# Altium PCB PCB_3U_ADC.PCBDOC (part 1 of 2)
Units mil, origin at the board's own origin, x right, y up, seen from the top; angles counter-clockwise.
Board outline 2496.06 x 3937 mil, 4 copper layers (TopLayer, Internal Plane 2, Internal Plane 1, BottomLayer), stack 35.634 mil thick; 110 components, 84 nets, 514 pads, 355 vias.
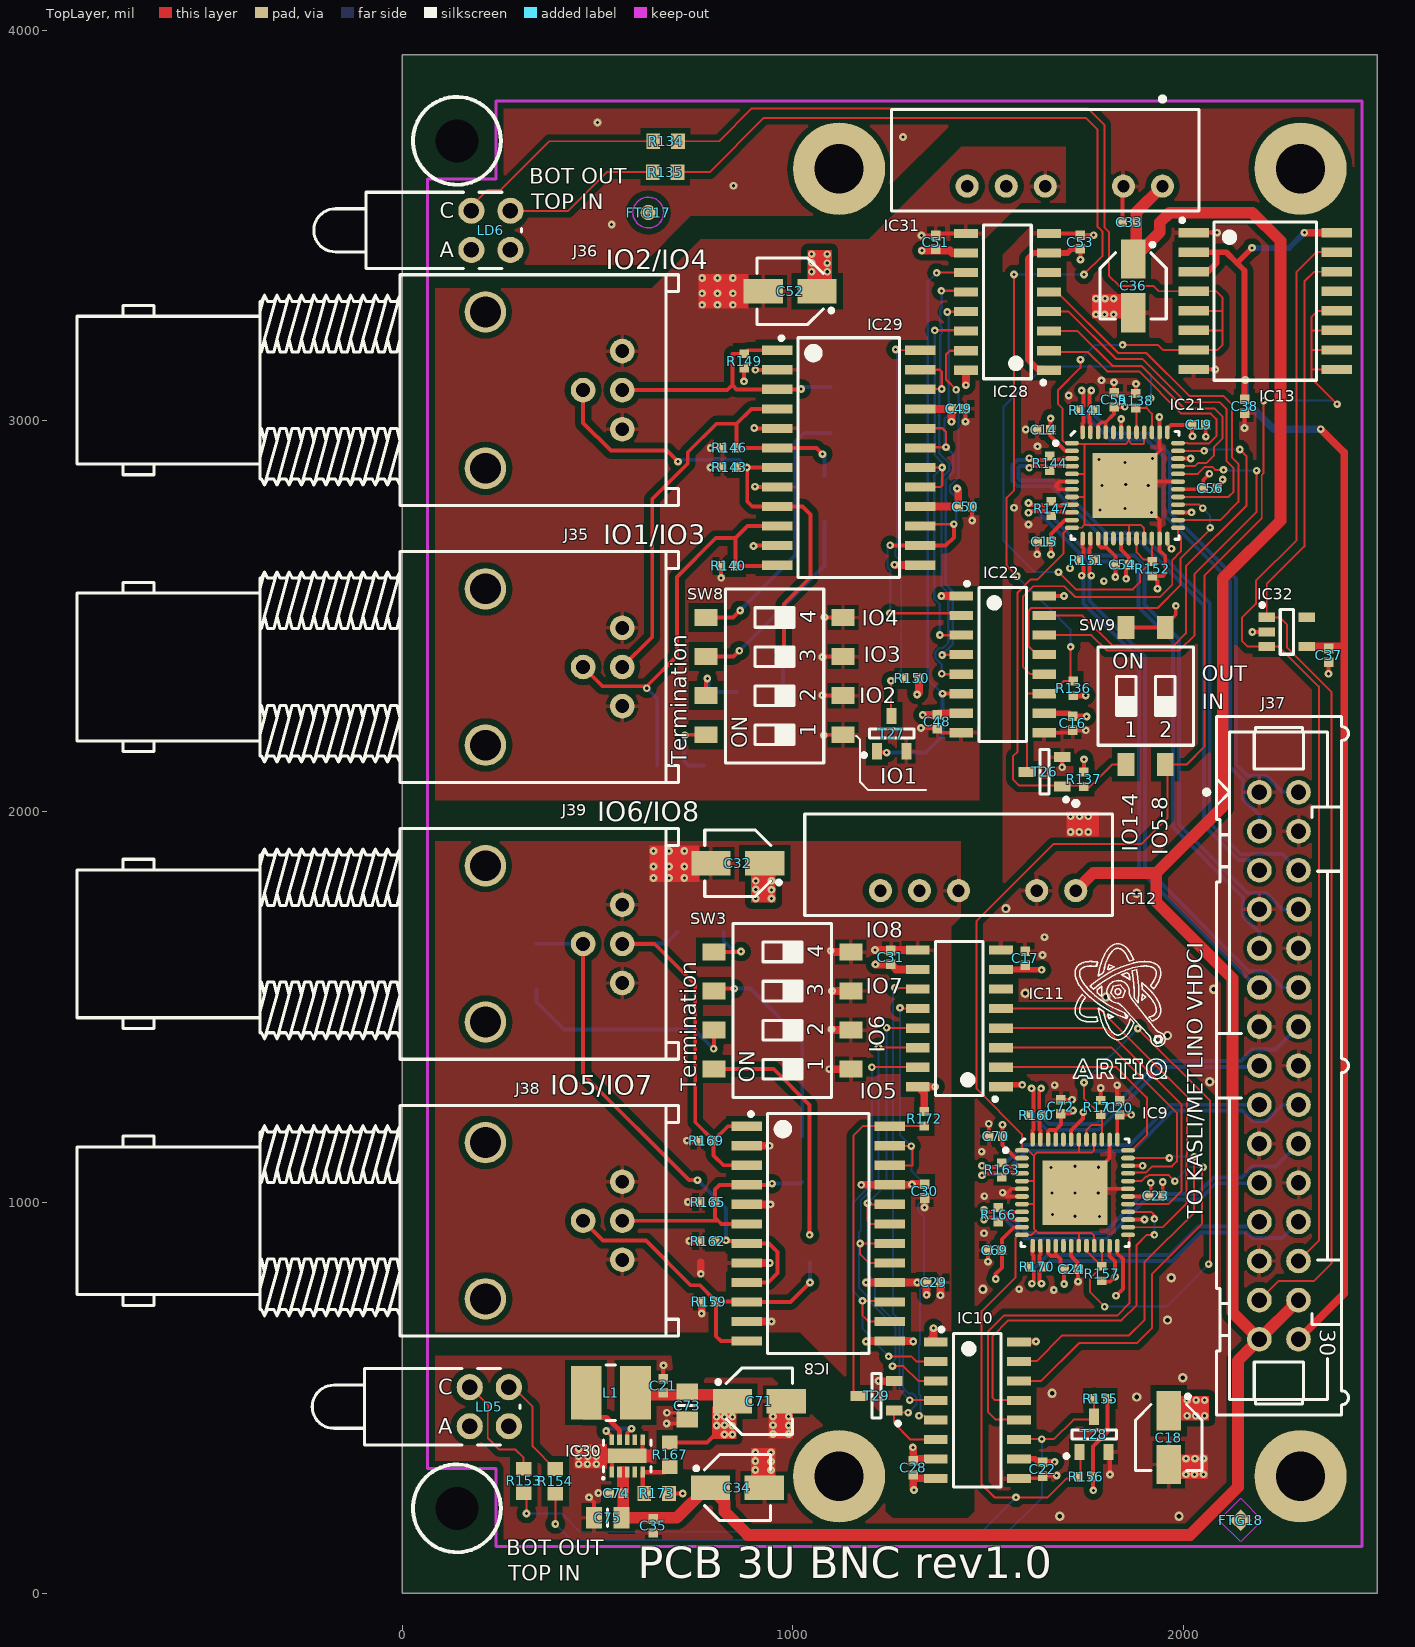
[diagram p0: TopLayer view]
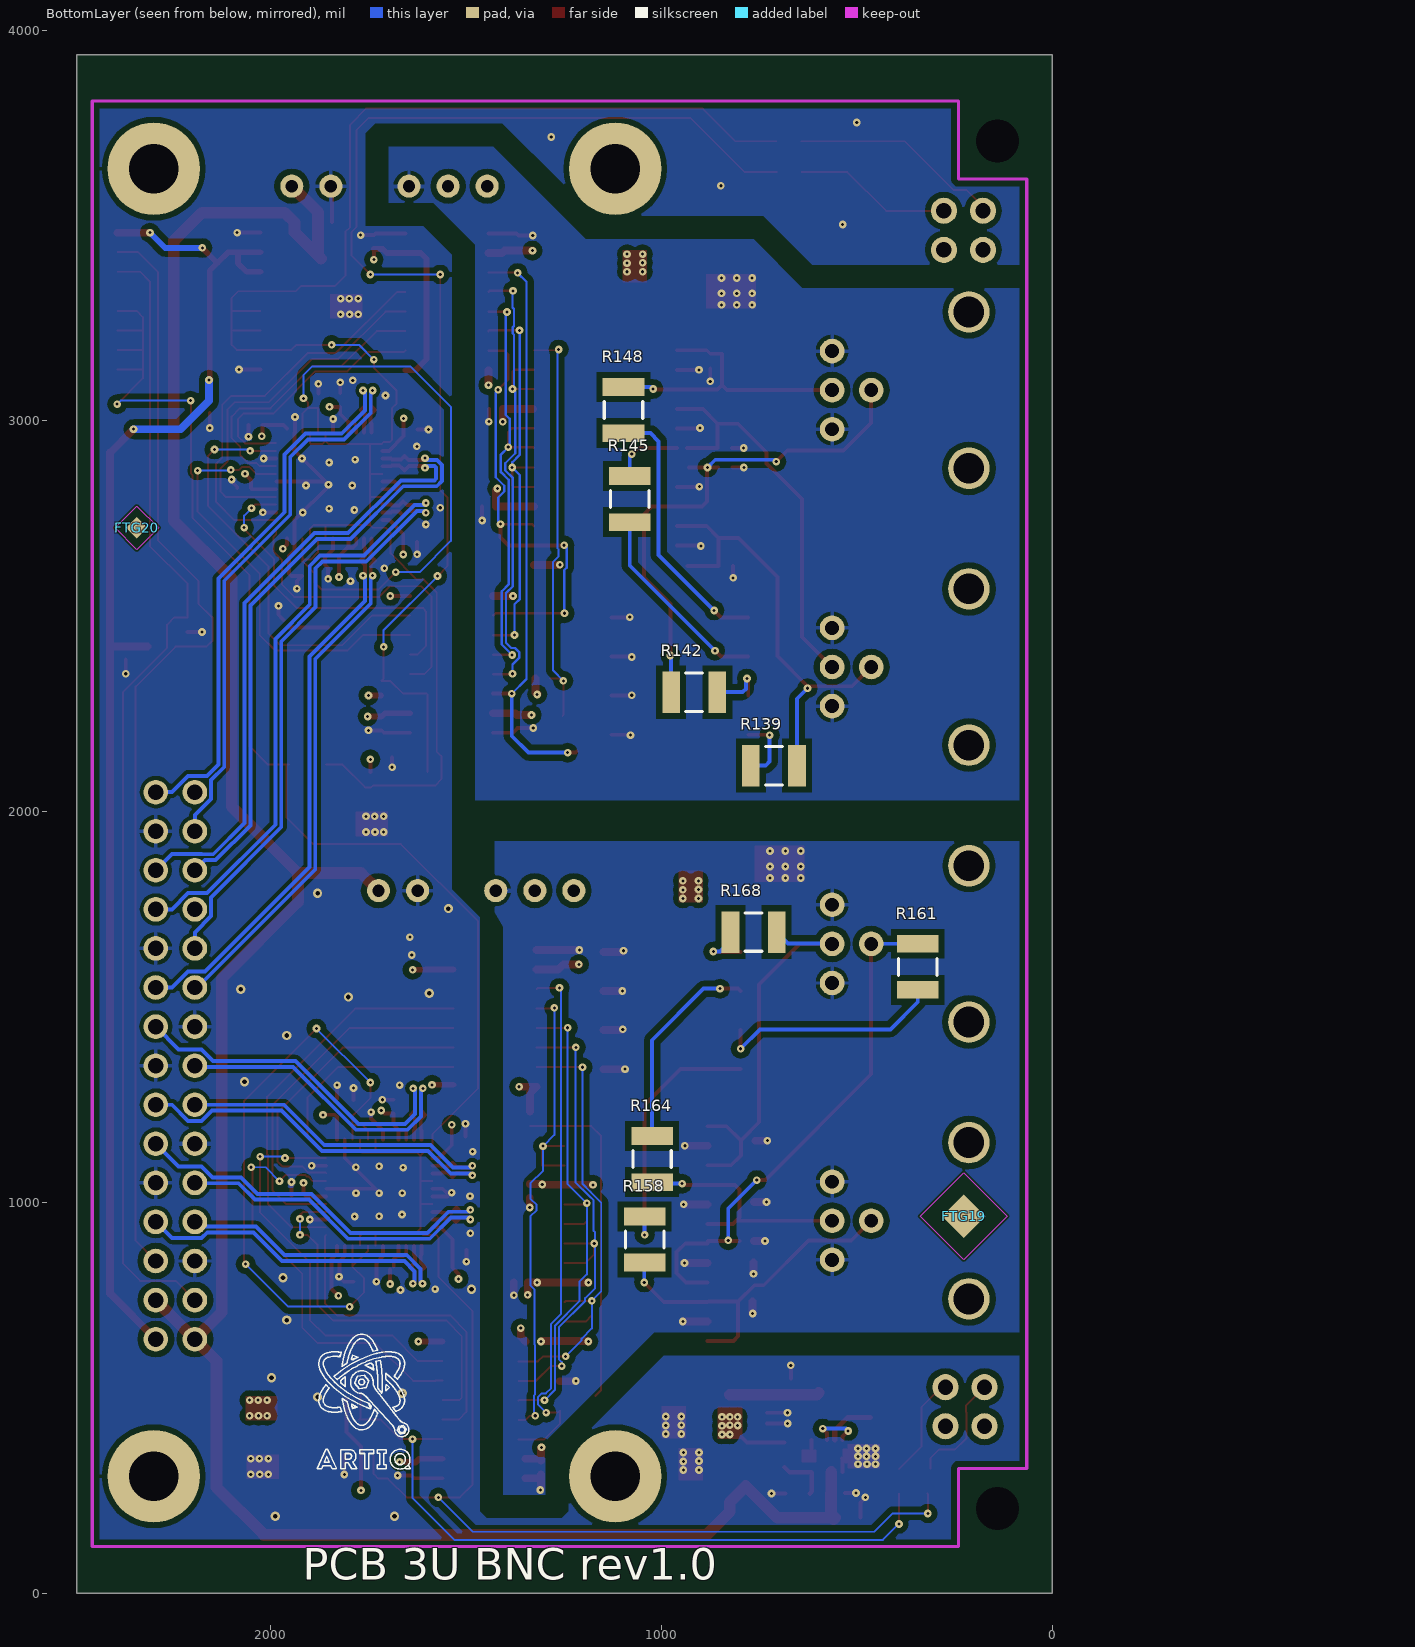
[diagram p1: BottomLayer view, seen from below]
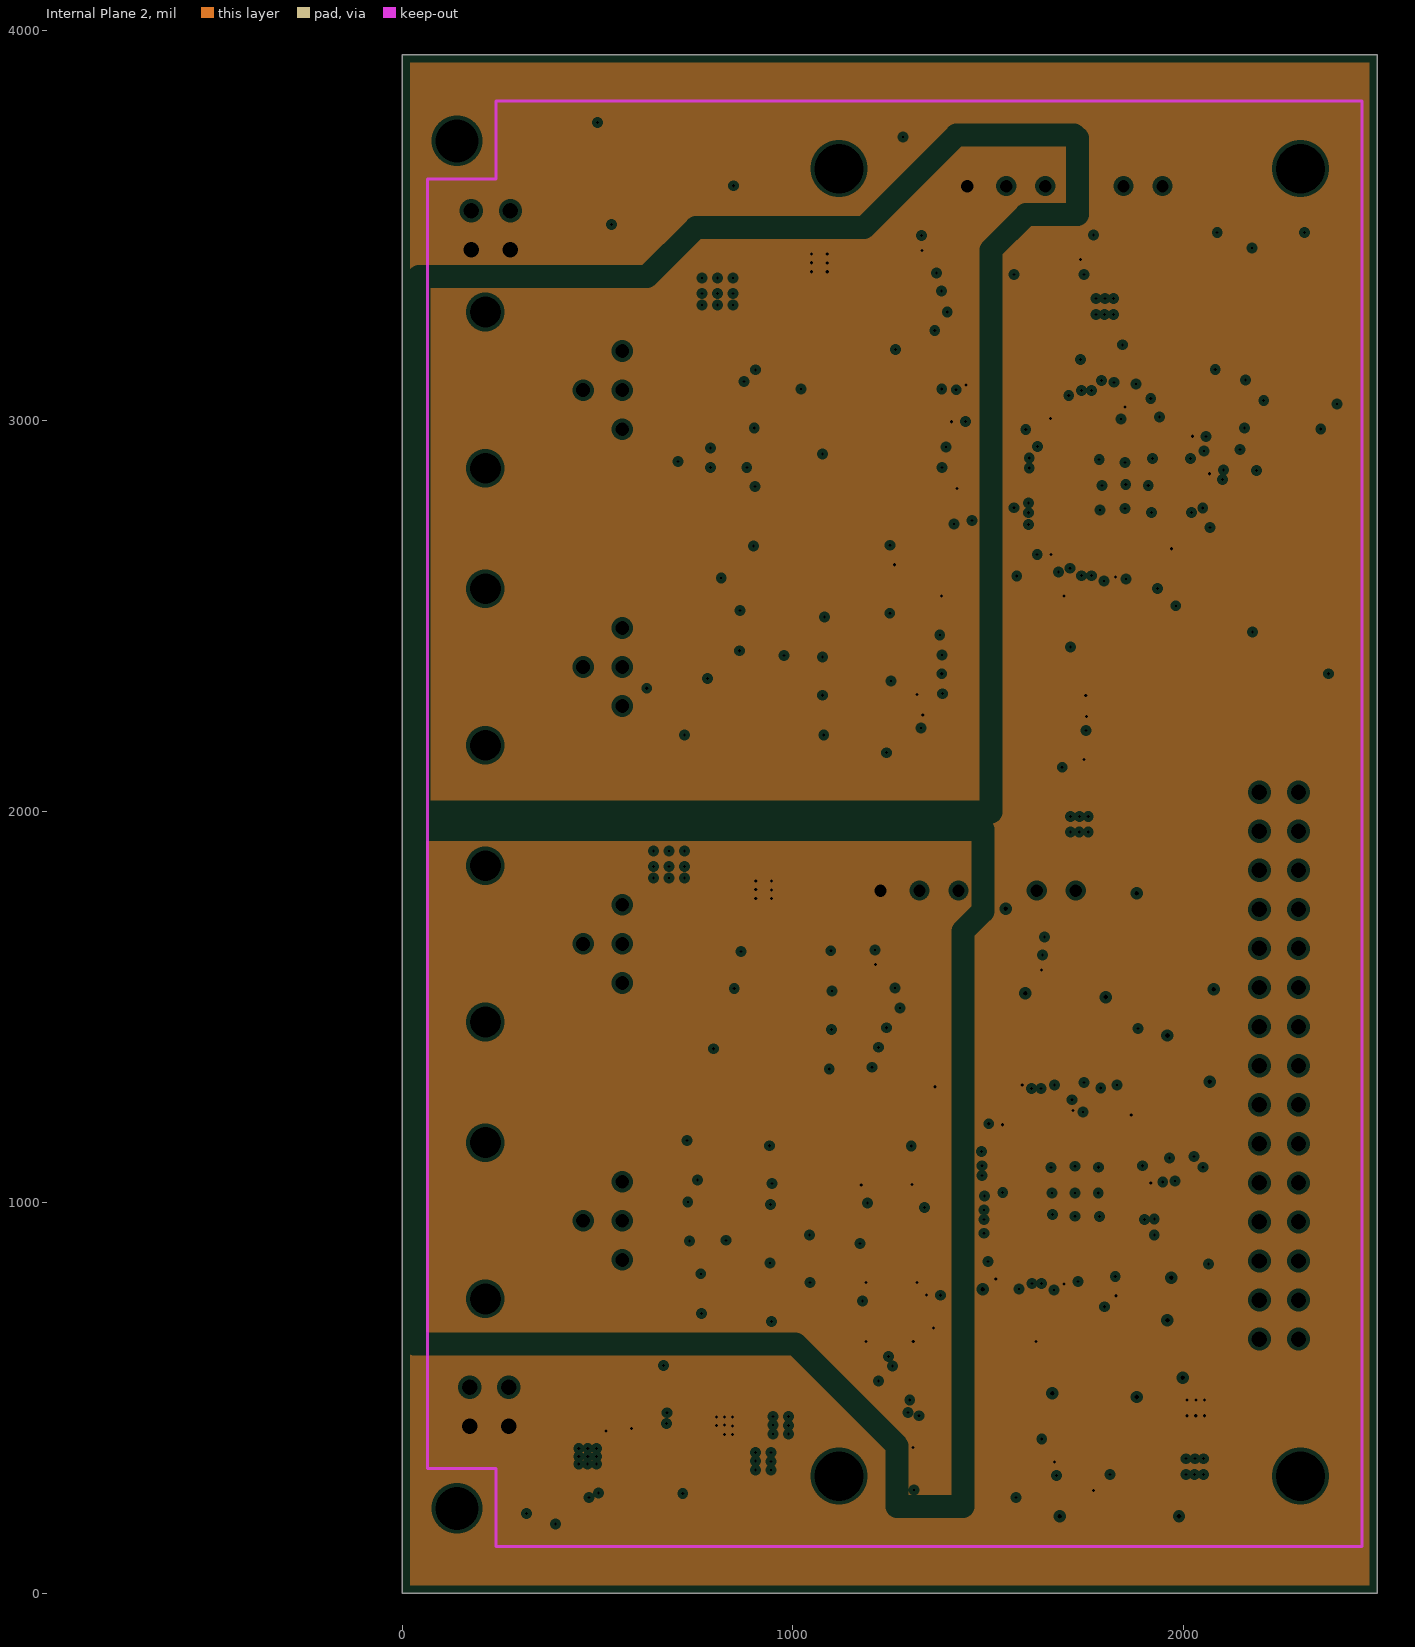
[diagram p2: Internal Plane 2, clearances drawn from the general rule]
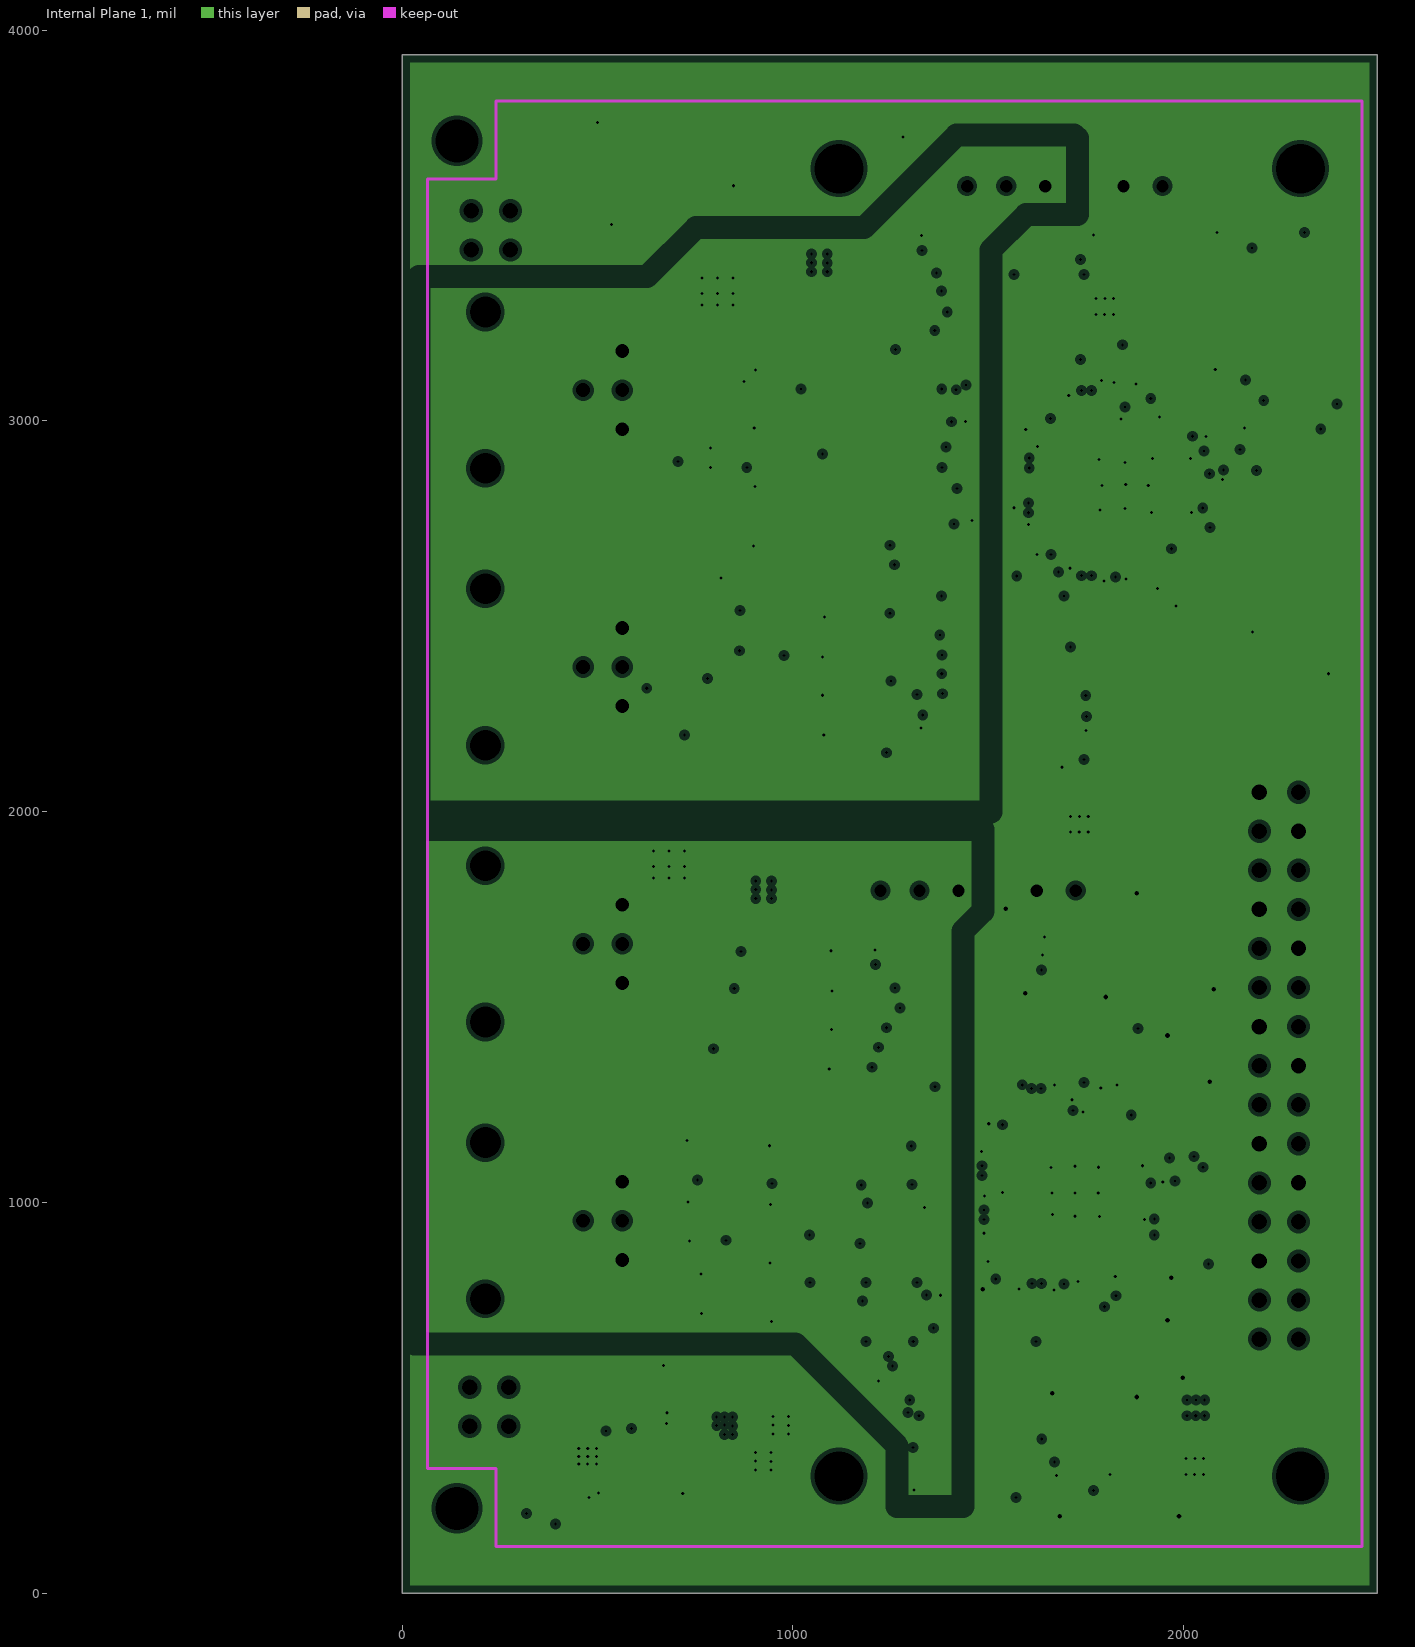
[diagram p3: Internal Plane 1, clearances drawn from the general rule]
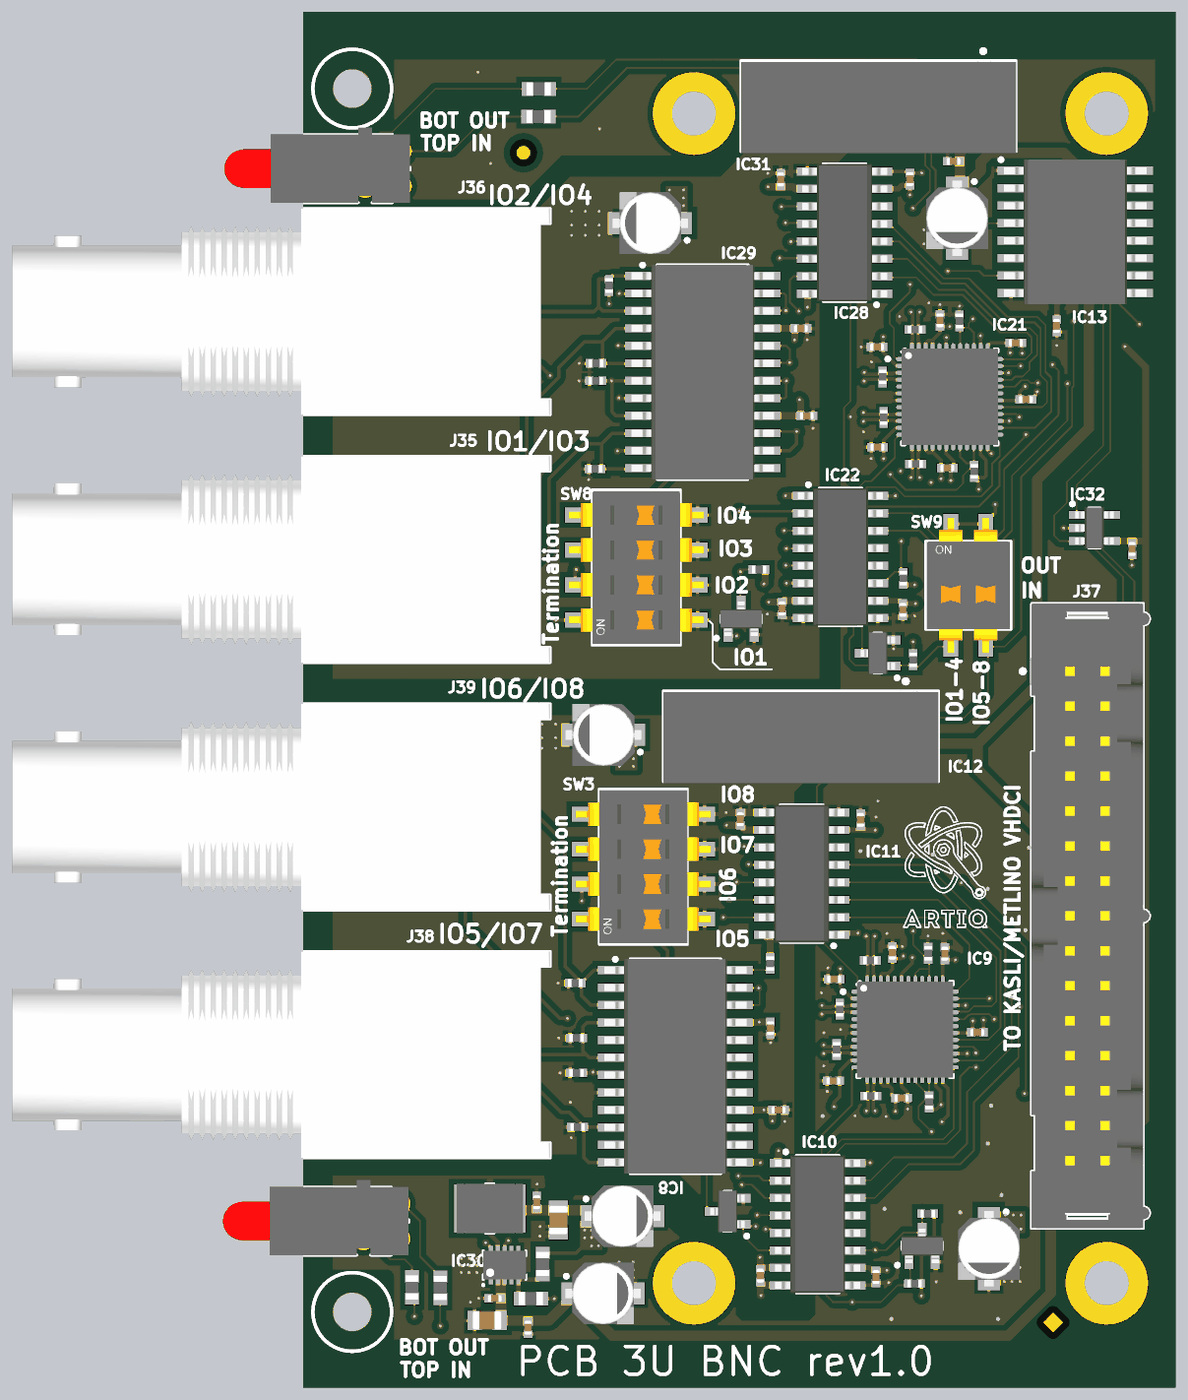
[diagram p5: 3D render of the assembled board from above, using the file's embedded part models]
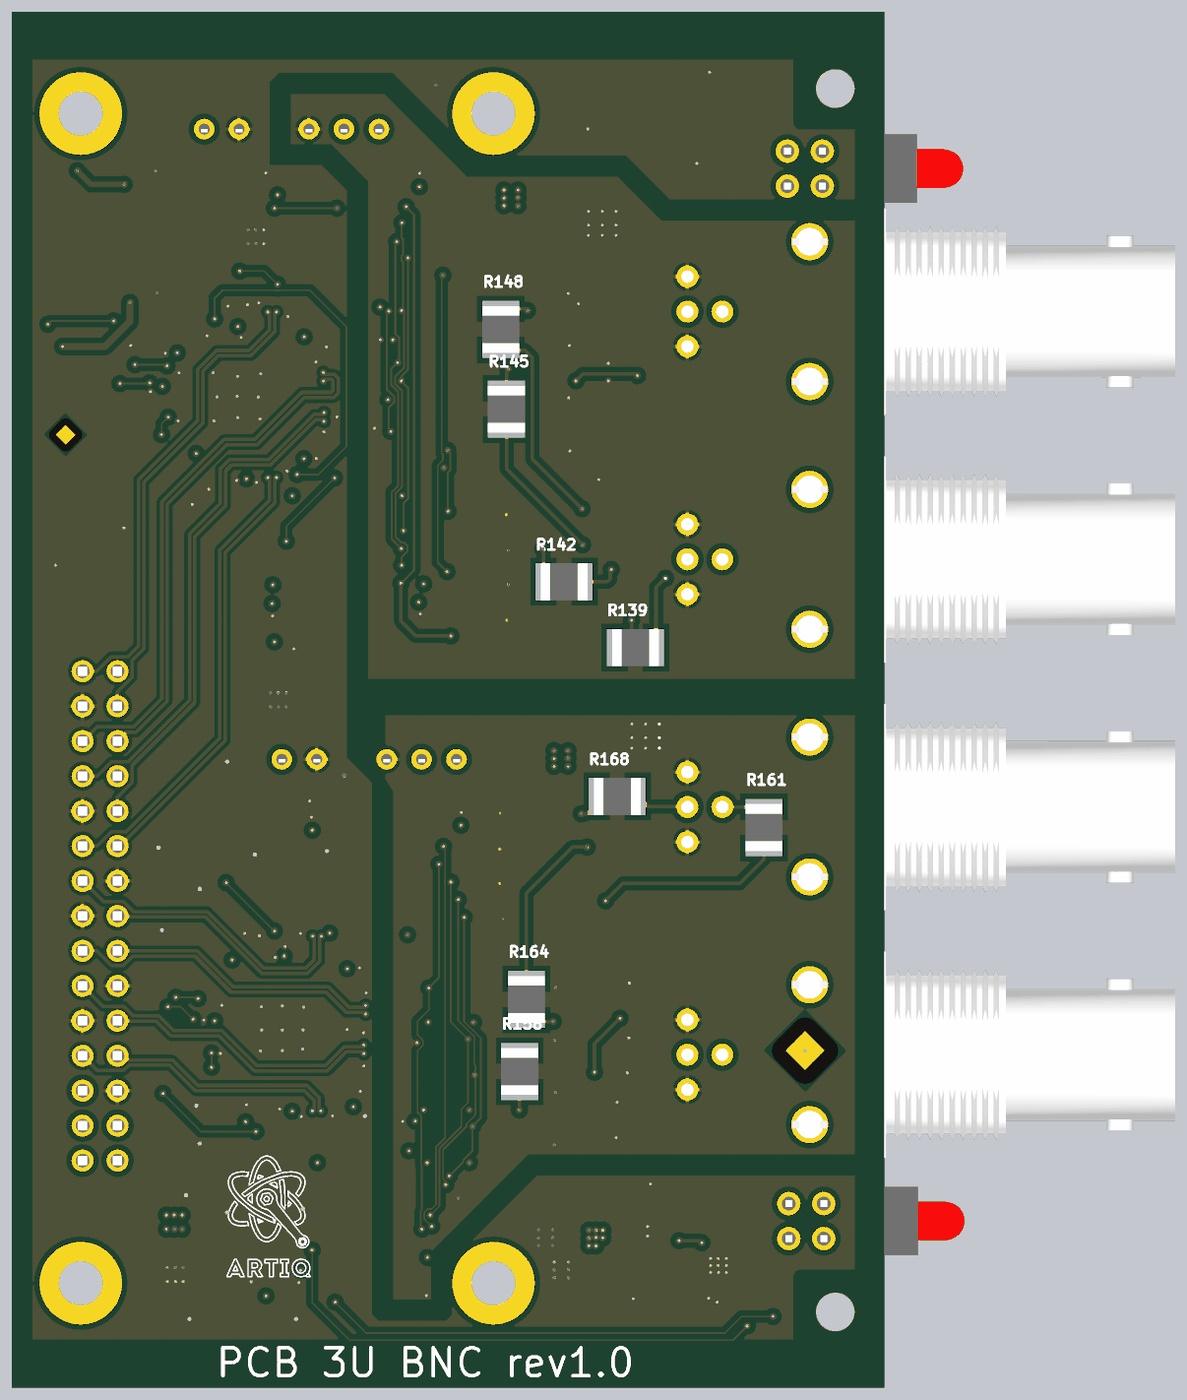
[diagram p6: 3D render of the assembled board from below, using the file's embedded part models]

## Layer stack, top to bottom
TopSolder: solder mask 0.4, Solder Resist, Dk 3.5
TopLayer: signal copper 1.4
Dielectric1: core 15, FR-4, Dk 4.8
Internal Plane 2: plane copper 1.417, net P3V3
Dielectric 3: prepreg 5, Dk 4.2
Internal Plane 1: plane copper 1.417, net (Multiple Nets)
Dielectric2: core 10, FR-4, Dk 4.2
BottomLayer: signal copper 1.4
BottomSolder: solder mask 0.4, Solder Resist, Dk 3.5

## Board outline
0,0 2496.06,0 2496.06,3937 0,3937

## Design rules (kind name [scope] priority, off if disabled: settings)
Clearance Clearance_DIFF [(InDifferentialPairClass('All Differential Pairs'))] p1: gap=5 except(10: Arc-Poly Track-Poly SMDPad-Poly THPad-Poly Via-Poly Fill-Poly Poly-Poly Poly-Region Poly-Text)
Clearance [All] p2: gap=5 except(15: Arc-Poly Track-Poly SMDPad-Poly THPad-Poly Via-Poly Fill-Poly Poly-Poly)
DiffPairsRouting [All] p1: maxlimit=10 minlimit=5 mostfreqgap=5 toplayer_minwidth=5 toplayer_maxwidth=15 toplayer_prefwidth=10 bottomlayer_minwidth=5 bottomlayer_maxwidth=15 bottomlayer_prefwidth=10 maxuncoupledlength=500
FabricationTestPointUsage TestPointUsage [All] p1: valid=0 allowmultiple=FALSE
FabricationTestpoint Testpoint [All] p1: side=3 testpointundercomponent=TRUE minsize=40 maxsize=100 preferedsize=60 minholesize=20 maxholesize=40 preferedholesize=32 testpointgrid=1 allowsidetop=TRUE allowsidebottom=TRUE usegrid=TRUE gridtolerance=0.01
HoleSize [All] p1: absolutevalues=TRUE maxlimit=150 minlimit=1 maxpercent=80.000 minpercent=20.000
HoleToHoleClearance [All] p1: gap=1 allowstackedmicrovias=TRUE
MinimumSolderMaskSliver [All] p1: minsoldermaskwidth=0
PlaneClearance [All] p1: clearance=10
PlaneConnect [All] p1: planeconnectstyle=Direct reliefexpansion=20 reliefentries=4 reliefconductorwidth=10 reliefairgap=10
PolygonConnect PolygonConnect_pad [(InPadClass('All Pads'))] p1: connectstyle=Relief reliefconductorwidth=10 reliefentries=4 polygonreliefangle="90 Angle" airgapwidth=10
PolygonConnect [All] p2: connectstyle=Direct reliefconductorwidth=10 reliefentries=4 polygonreliefangle="45 Angle" airgapwidth=10
RoomDefinition PCB_3U_BNC [InComponentClass('PCB_3U_BNC')] p1: confinementstyle=ConfineIn formatcopy=TRUE lockcomponents=FALSE outline -960,-90 2512,-90 2512,4002 -960,4002
RoutingVias [All] p1: holewidth=7.87 width=19.68 viastyle="Through Hole" minholewidth=7.87 minwidth=19.68 maxholewidth=28 maxwidth=50
SilkToSilkClearance [All] p1: silktosilkclearance=0
SilkToSolderMaskClearance SilkscreenOverComponentPads [IsPad] p1: minsilkscreentomaskgap=0 clearancetoexposedcopper=TRUE
SolderMaskExpansion [All] p1: expansion=2
Width [All] p1: maxlimit=50 minlimit=5 preferedwidth=5
20 further rules are at their usual default settings.

## Classes and differential pairs
differential pair LVDS1: +LVDS1_P -LVDS1_N
differential pair LVDS2: +LVDS2_P -LVDS2_N
differential pair LVDS3: +LVDS3_P -LVDS3_N
differential pair LVDS4: +LVDS4_P -LVDS4_N
differential pair LVDS5: +LVDS5_P -LVDS5_N
differential pair LVDS6: +LVDS6_P -LVDS6_N
differential pair LVDS7: +LVDS7_P -LVDS7_N
differential pair LVDS8: +LVDS8_P -LVDS8_N

## Components (designator, comment, footprint, x,y, rotation, side; value= is the part's Value field where it differs from the comment)
C14 "100nF" CAPC1005X55N 1642,2978 r0 top
C15 "100nF" CAPC1005X55N 1643,2691 r0 top
C16 "100nF" CAPC1005X55N 1716,2226 r90 top
C17 "100nF" CAPC1005X55N 1595,1625 r270 top
C18 "10uF" CAPAE430X540N 1962,398 r270 top
C19 "100nF" CAPC1005X55N 2039,2990 r180 top
C20 "100nF" CAPC1005X55N 1836,1242 r270 top
C21 "100nF" CAPC1005X55N 668,531 r270 top
C22 "100nF" CAPC1005X55N 1639,317 r90 top
C23 "100nF" CAPC1005X55N 1929,1017 r180 top
C24 "100nF" CAPC1005X55N 1712,829 r180 top
C28 "100nF" CAPC1005X55N 1308,321 r90 top
C29 "100nF" CAPC1005X55N 1360,795 r180 top
C30 "100nF" CAPC1005X55N 1337,1029 r90 top
C31 "100nF" CAPC1005X55N 1251,1627 r270 top
C32 "10uF" CAPAE430X540N 859,1868 r180 top
C33 "100nF" CAPC1005X55N 1861,3509 r0 top
C34 "10uF" CAPAE430X540N 858,270 r0 top
C35 "100nF" CAPC1005X55N 643,172 r90 top
C36 "10uF" CAPAE430X540N 1871,3346 r270 top
C37 "100nF" CAPC1005X55N 2372,2400 r90 top
C38 "100nF" CAPC1005X55N 2156,3038 r90 top
C48 "100nF" CAPC1005X55N 1370,2230 r90 top
C49 "100nF" CAPC1005X55N 1424,3031 r180 top
C50 "100nF" CAPC1005X55N 1441,2781 r180 top
C51 "100nF" CAPC1005X55N 1366,3457 r270 top
C52 "10uF" CAPAE430X540N 993,3332 r180 top
C53 "100nF" CAPC1005X55N 1736,3458 r270 top
C54 "100nF" CAPC1005X55N 1843,2632 r180 top
C55 "100nF" CAPC1005X55N 1822,3054 r270 top
C56 "100nF" CAPC1005X55N 2068,2828 r180 top
C69 "100nF" CAPC1005X55N 1517,878 r0 top
C70 "100nF" CAPC1005X55N 1519,1169 r0 top
C71 "10uF" CAPAE430X540N 914,491 r0 top
C72 "100nF" CAPC1005X55N 1686,1245 r270 top
C73 "22uF" CAPC2012X135N 730,480 r90 top
C74 "100nF" CAPC1005X55N 548,256 r0 top
C75 "22uF" CAPC2012X135N 526,193 r0 top
FTG17 "Use only in PCB" FIDUCIAL_TOP_C100-200 629.92,3533.46 r90 top
FTG18 "Use only in PCB" FIDUCIAL_TOP_S100-200 2145.67,187.01 r90 top
FTG19 "Use only in PCB" FIDUCIAL_TOP_S200-400 226.38,964.57 r180 bottom
FTG20 "Use only in PCB" FIDUCIAL_TOP_S100-200 2342.52,2726.38 r90 bottom
IC8 "SN74BCT25245DW" SOIC127P1030X265-24N 1065,920 r0 top
IC9 "SN65MLVD040RGZT" QFN50P700X700X100-49N-S420 1722,1025 r0 top
IC10 "SI8651BB-B-IS1" SOIC127P600X175-16N 1472,468 r0 top
IC11 "SI8651BB-B-IS1" SOIC127P600X175-16N 1426,1471 r180 top
IC12 "TMA 1205S" DCDC_TRACO_TMA 1424,1798 r180 top
IC13 "PCF8574ADW" SOIC127P1030X265-16N 2209,3307 r0 top
IC21 "SN65MLVD040RGZT" QFN50P700X700X100-49N-S420 1850,2835 r0 top
IC22 "SI8651BB-B-IS1" SOIC127P600X175-16N 1537,2377 r0 top
IC28 "SI8651BB-B-IS1" SOIC127P600X175-16N 1549,3305 r180 top
IC29 "SN74BCT25245DW" SOIC127P1030X265-24N 1143,2906 r0 top
IC30 "TPS62175DQC" SON50P200X300X80-11N-R94X250 576,351 r90 top
IC31 "TMA 1205S" DCDC_TRACO_TMA 1646,3601 r180 top
IC32 "24AA02E48T-I/OT" SOT95P280X145-5N 2264,2460 r0 top
J35 "BNC" BOMAR_364A2595 319,2370.32 r180 top locked
J36 "BNC" BOMAR_364A2595 319,3078.98 r180 top locked
J37 "Familly" 3M_N2530-6002RB 2244,1350 r270 top locked
J38 "BNC" BOMAR_364A2595 319,953 r180 top locked
J39 "BNC" BOMAR_364A2595 319,1661.66 r180 top locked
L1 "10uH" IND_MURATA-PS_8400 534.01,513 r0 top
LD5 "Green/Red" LED_MENTOR_1801.8233 173,477 r0 top locked
LD6 "Green/Red" LED_MENTOR_1801.8233 177,3488 r0 top locked
R134 "220" RESC1608X55N 674,3716 r0 top
R135 "220" RESC1608X55N 673,3637 r0 top
R136 "10k" RESC1005X40N 1717,2316 r270 top
R137 "10k" RESC1005X40N 1745,2083 r90 top
R138 "100" RESC1005X40N 1878,3052 r90 top
R139 "49R9" RESC3225X70N 712,2118 r180 bottom
R140 "10k" RESC1005X40N 835,2629 r0 top
R141 "100" RESC1005X40N 1751,3028 r180 top
R142 "49R9" RESC3225X70N 916,2306 r0 bottom
R143 "10k" RESC1005X40N 837,2881 r0 top
R144 "100" RESC1005X40N 1658,2892 r270 top
R145 "49R9" RESC3225X70N 1081,2800 r90 bottom
R146 "10k" RESC1005X40N 837.5,2931 r0 top
R147 "100" RESC1005X40N 1661,2776 r270 top
R148 "49R9" RESC3225X70N 1097,3028 r90 bottom
R149 "10k" RESC1005X40N 875,3153.5 r90 top
R150 "10k" RESC1005X40N 1304,2341 r0 top
R151 "100" RESC1005X40N 1752,2643 r0 top
R152 "10k" RESC1005X40N 1920,2622 r270 top
R153 "220" RESC1608X55N 311,287 r270 top
R154 "220" RESC1608X55N 392,286 r270 top
R155 "10k" RESC1005X40N 1787,498 r0 top
R156 "10k" RESC1005X40N 1749,298 r0 top
R157 "100" RESC1005X40N 1791,818 r270 top
R158 "49R9" RESC3225X70N 1043,905 r270 bottom
R159 "10k" RESC1005X40N 785,746 r0 top
R160 "100" RESC1005X40N 1623,1223 r180 top
R161 "49R9" RESC3225X70N 344,1603 r90 bottom
R162 "10k" RESC1005X40N 782,901 r0 top
R163 "100" RESC1005X40N 1535,1083 r270 top
R164 "49R9" RESC3225X70N 1024,1111 r270 bottom
R165 "10k" RESC1005X40N 782,1001 r0 top
R166 "100" RESC1005X40N 1526,968 r270 top
R167 "270k" RESC1608X55N 685,354 r90 top
R168 "49R9" RESC3225X70N 764,1692 r180 bottom
R169 "10k" RESC1005X40N 778,1158 r0 top
R170 "100" RESC1005X40N 1624,835 r0 top
R171 "10k" RESC1005X40N 1788,1243 r90 top
R172 "10k" RESC1005X40N 1336,1214 r90 top
R173 "82k" RESC1608X55N 651,255 r180 top
SW3 "Switch" SW_OMRON_A6S-4102-H 973,1491 r180 top
SW8 "Switch" SW_OMRON_A6S-4102-H 953,2347 r180 top
SW9 "Switch" SW_OMRON_A6S-2102-H 1903,2296 r90 top
T26 "BSS138LT1G" SOT95P240X110-3N 1644,2102 r180 top
T27 "BSS138LT1G" SOT95P240X110-3N 1253,2200 r90 top
T28 "BSS138LT1G" SOT95P240X110-3N 1771,406 r90 top
T29 "BSS138LT1G" SOT95P240X110-3N 1214,505 r180 top

## Footprints (in the part's own frame and the unit in brackets; to place one, negate y for a bottom-side part, rotate by r counter-clockwise, add the part's x,y. Pads: shape width x height; smd on the part's side, far side on the other; paste and mask are expansions set on the pad)
3M_N2530-6002RB [mm] "30 Contacts - Straight .100\" x .100\" Low Profile Four-Wall Header"
  round 1.6 hole 1: 1(-17.78,-1.27) 2(-17.78,1.27) 3(-15.24,-1.27) 4(-15.24,1.27) 5(-12.7,-1.27) 6(-12.7,1.27) 7(-10.16,-1.27) 8(-10.16,1.27) 9(-7.62,-1.27) 10(-7.62,1.27) 11(-5.08,-1.27) 12(-5.08,1.27) 13(-2.54,-1.27) 14(-2.54,1.27) 15(0,-1.27) 16(0,1.27) 17(2.54,-1.27) 18(2.54,1.27) 19(5.08,-1.27) 20(5.08,1.27) 21(7.62,-1.27) 22(7.62,1.27) 23(10.16,-1.27) 24(10.16,1.27) 25(12.7,-1.27) 26(12.7,1.27) 27(15.24,-1.27) 28(15.24,1.27) 29(17.78,-1.27) 30(17.78,1.27)
  silkscreen extent -22.71,-4.85 22.71,4.52, body extent -22.71,-4.11 22.71,4.52, height 9.91
BOMAR_364A2595 [mm] "Dual Right Angle 50 Ohm BNC Jack, White Valox Case"
  round 1.6 hole 0.9: 1(-6.2,2.54) 2(-6.2,0) 3(-6.2,-2.54) 4(-3.66,0)
  round 2.7 hole 2: 6(2.69,-5.08) 7(2.69,5.08)
  silkscreen extent -9.85,-7.5 29.25,7.5, body extent -9.85,-7.5 29.25,7.5, height 29.3
CAPAE430X540N [mm] "Capacitor, Aluminium Electrolytric, 4.3mm L X 4.3mm W X 5.4mm H, IPC Medium Density"
  rect 2.55x1.6 smd: 1(-1.75,0) 2(1.75,0)
  silkscreen extent -2.8,-2.15 2.15,2.15, body extent -2.75,-2.25 2.75,2.25, height 5.7
CAPC1005X55N [mm] "Chip Capacitor, Body 1.0x0.55mm, IPC Medium Density"
  rect 0.62x0.62 smd: 1(-0.45,0) 2(0.45,0)
  body extent -0.52,-0.27 0.53,0.28, height 0.55
CAPC2012X135N [mm] "Chip Capacitor, Body 2.0x1.25mm, IPC Medium Density"
  rect 1.05x1.4 smd: 1(-0.9,0) 2(0.9,0)
  silkscreen extent 0,-0.58 0,0.58, body extent -1.05,-0.67 1.05,0.68, height 1.25
DCDC_TRACO_TMA [mm] "TMA Series , Body 19.5x6.1mm, SIP-6, Unregulated"
  round 1.5 hole 0.8: 1(-7.62,0) 2(-5.08,0) 4(0,0) 5(2.54,0) 6(5.08,0)
  silkscreen extent -10,-5.82 10,1.63, body extent -10,-4.97 10,1.73, height 10.45
FIDUCIAL_TOP_C100-200 [mm] "Round Fiducial Target, Top Layer, 1.0mm, Top Solder 2.0mm, Keepout =2.0mm"
  round 1 smd paste-0.51 mask+0.5: FTG2(0,0)
  TopLayer keep-out circle w0.1: c0,0 r1
FIDUCIAL_TOP_S100-200 [mm] "Square Fiducial Target, Top Layer, 1.0mm, Top Solder 2.0mm, Keepout =2.0mm"
  rect 1x1 smd rot 45 paste-0.51 mask+0.5: 1(0,0)
  TopLayer keep-out region: 1.414,0 0,-1.414 -1.414,0 0,1.414
FIDUCIAL_TOP_S200-400 [mm] "Square Fiducial Target, Top Layer, 2.0mm, Top Solder 4.0mm, Keepout =4.0mm"
  rect 2x2 smd rot 45 paste-0.9 mask+1: 1(0,0)
  TopLayer keep-out region: -2.839,0.011 -0.011,2.839 2.818,0.011 -0.011,-2.818
IND_MURATA-PS_8400 [mm] "Miniature Surface Mount Power Inductors, 4.5mm L X 3.3mm W X 2.9mm H, MURATA 8400 Serie"
  rect 2x3.5 smd: 1(-1.6,0) 2(1.6,0)
  silkscreen extent -0.3,-1.8 0.3,1.8, body extent -2.4,-1.8 2.4,1.8, height 2.9
LED_MENTOR_1801.8233 [mm] "2 x LED 3mm  (Top: Red, Bot: Green) PCB Edge Mounting MENTOR 1801.8233"
  round 1.7 hole 1: 1(0,1.27) 2(0,-1.27) 3(2.54,1.27) 4(2.54,-1.27)
  silkscreen extent -10.24,-2.48 3.26,2.48, body extent -10.24,-2.47 3.25,2.98, height 10
QFN50P700X700X100-49N-S420 [mm] "QFN, 0.50mm Pitch, Square; 48 Pin, 7.00mm L X 7.00mm W X 1mm H body (W/Thermal Tab 4.2mm X 4.2mm), IPC Medium Density"
  oval 0.9x0.3 smd: 1(-3.45,2.75) 2(-3.45,2.25) 3(-3.45,1.75) 4(-3.45,1.25) 5(-3.45,0.75) 6(-3.45,0.25) 7(-3.45,-0.25) 8(-3.45,-0.75) 9(-3.45,-1.25) 10(-3.45,-1.75) 11(-3.45,-2.25) 12(-3.45,-2.75) 25(3.45,-2.75) 26(3.45,-2.25) 27(3.45,-1.75) 28(3.45,-1.25) 29(3.45,-0.75) 30(3.45,-0.25) 31(3.45,0.25) 32(3.45,0.75) 33(3.45,1.25) 34(3.45,1.75) 35(3.45,2.25) 36(3.45,2.75)
  oval 0.3x0.9 smd: 13(-2.75,-3.45) 14(-2.25,-3.45) 15(-1.75,-3.45) 16(-1.25,-3.45) 17(-0.75,-3.45) 18(-0.25,-3.45) 19(0.25,-3.45) 20(0.75,-3.45) 21(1.25,-3.45) 22(1.75,-3.45) 23(2.25,-3.45) 24(2.75,-3.45) 37(2.75,3.45) 38(2.25,3.45) 39(1.75,3.45) 40(1.25,3.45) 41(0.75,3.45) 42(0.25,3.45) 43(-0.25,3.45) 44(-0.75,3.45) 45(-1.25,3.45) 46(-1.75,3.45) 47(-2.25,3.45) 48(-2.75,3.45)
  rect 4.2x4.2 smd: 49(0,0)
  silkscreen extent -4.62,-3.5 3.5,3.5, body extent -3.5,-3.5 3.5,3.5, height 1
RESC1005X40N [mm] "Chip Resistor, EIA 0402, Metric 1005, Body 1.0x0.5mm, IPC Medium Density"
  rect 0.58x0.62 smd: 1(-0.47,0) 2(0.47,0)
  body extent -0.52,-0.27 0.53,0.28, height 0.4
RESC1608X55N [mm] "Chip Resistor, EIA 0603, Metric 1608, Body 1.6x0.8mm, IPC Medium Density"
  rect 0.9x1 smd: 1(-0.8,0) 2(0.8,0)
  body extent -0.87,-0.47 0.88,0.48, height 0.55
RESC3225X70N [mm] "Chip Resistor, EIA 1210, Metric 3225, Body 3.2x2.5mm, IPC Medium Density"
  rect 1.15x2.7 smd: 1(-1.5,0) 2(1.5,0)
  silkscreen extent -0.55,-1.25 0.55,1.25, body extent -1.7,-1.35 1.7,1.35, height 0.7
SOIC127P600X175-16N [mm] "SOIC 16, Pitch 1.27mm - Body 4x10mm, IPC Medium Density"
  rect 1.55x0.6 smd: 1(-2.7,4.445) 2(-2.7,3.175) 3(-2.7,1.905) 4(-2.7,0.635) 5(-2.7,-0.635) 6(-2.7,-1.905) 7(-2.7,-3.175) 8(-2.7,-4.445) 9(2.7,-4.445) 10(2.7,-3.175) 11(2.7,-1.905) 12(2.7,-0.635) 13(2.7,0.635) 14(2.7,1.905) 15(2.7,3.175) 16(2.7,4.445)
  silkscreen extent -2.45,-5 1.55,5.37, body extent -3.1,-5 3.1,5, height 1.75
SOIC127P1030X265-16N [mm] "SOIC 16, Pitch 1.27mm - Body 7.5x10.3mm, IPC Medium Density"
  rect 2x0.6 smd: 1(-4.65,4.445) 2(-4.65,3.175) 3(-4.65,1.905) 4(-4.65,0.635) 5(-4.65,-0.635) 6(-4.65,-1.905) 7(-4.65,-3.175) 8(-4.65,-4.445) 9(4.65,-4.445) 10(4.65,-3.175) 11(4.65,-1.905) 12(4.65,-0.635) 13(4.65,0.635) 14(4.65,1.905) 15(4.65,3.175) 16(4.65,4.445)
  silkscreen extent -5.52,-5.15 3.32,5.37, body extent -5.18,-5.25 5.18,5.25, height 1.68
SOIC127P1030X265-24N [mm] "SOIC 24, Pitch 1.27mm - Body 7.6x15.6mm, IPC Medium Density"
  rect 2x0.6 smd: 1(-4.65,6.985) 2(-4.65,5.715) 3(-4.65,4.445) 4(-4.65,3.175) 5(-4.65,1.905) 6(-4.65,0.635) 7(-4.65,-0.635) 8(-4.65,-1.905) 9(-4.65,-3.175) 10(-4.65,-4.445) 11(-4.65,-5.715) 12(-4.65,-6.985) 13(4.65,-6.985) 14(4.65,-5.715) 15(4.65,-4.445) 16(4.65,-3.175) 17(4.65,-1.905) 18(4.65,-0.635) 19(4.65,0.635) 20(4.65,1.905) 21(4.65,3.175) 22(4.65,4.445) 23(4.65,5.715) 24(4.65,6.985)
  silkscreen extent -4.5,-7.8 3.3,7.9, body extent -5.18,-7.8 5.18,7.8, height 1.68
SON50P200X300X80-11N-R94X250 [mm] "SON, 10-Leads, Body 2x3mm, Pitch 0.5mm, Thermal Pad 0.94x2.5mm, IPC Medium Density"
  rect 0.7x0.3 smd: 1(-1.05,1) 2(-1.05,0.5) 3(-1.05,0) 4(-1.05,-0.5) 5(-1.05,-1) 6(1.05,-1) 7(1.05,-0.5) 8(1.05,0) 9(1.05,0.5) 10(1.05,1)
  rect 0.94x2.5 smd: 11(0,0)
  silkscreen extent -1.5,-1.55 1.05,1.6, body extent -1.05,-1.55 1.05,1.55, height 0.8
SOT95P240X110-3N [mm] "SOT23 3-Leads, Pitch 0.95mm, Body 1.3x2.9mm, IPC Medium Density"
  rect 1.05x0.65 smd: 1(-1.15,0.95) 2(-1.15,-0.95) 3(1.15,0)
  silkscreen extent -1.53,-1.45 0.3,1.92, body extent -1.25,-1.5 1.25,1.5, height 1.1
SOT95P280X145-5N [mm] "SOT, 0.95mm pitch; 5 pin, 1.60mm W X 2.90mm L X 1.45mm H body, IPC Medium Density"
  rect 1.1x0.6 smd: 1(-1.3,0.95) 2(-1.3,0) 3(-1.3,-0.95) 4(1.3,-0.95) 5(1.3,0.95)
  silkscreen extent -1.72,-1.45 0.43,1.87, body extent -1.4,-1.5 1.4,1.5, height 1.45
SW_OMRON_A6S-2102-H [mm] "Pitch 2.54mm, Body 6.2x6.4mm, 2 Ways SPST Surface-Mounting DIP Switch, OMRON A6S-H"
  rect 1.5x1.1 smd: 1(-4.45,1.27) 2(-4.45,-1.27) 3(4.45,-1.27) 4(4.45,1.27)
  silkscreen extent -3.2,-3.11 3.2,3.11, body extent -4.9,-3.01 4.9,3.01, height 3.97
SW_OMRON_A6S-4102-H [mm] "Pitch 2.54mm, Body 11.3x6.4mm, 4 Ways SPST Surface-Mounting DIP Switch, OMRON A6S-H"
  rect 1.5x1.1 smd: 1(-4.45,3.81) 2(-4.45,1.27) 3(-4.45,-1.27) 4(-4.45,-3.81) 5(4.45,-3.81) 6(4.45,-1.27) 7(4.45,1.27) 8(4.45,3.81)
  silkscreen extent -3.2,-5.65 3.2,5.65, body extent -4.9,-5.55 4.9,5.55, height 3.97

## Part data
C14 C15 C16 C17 C19 C20 C21 C22 C23 C24 C28 C29 C30 C31 C33 C35 C37 C38 C48 C49 C50 C51 C53 C54 C55 C56 C69 C70 C72 C74: library part CC0402_100NF_16V_10%_X5R, "Non-polarised capacitor"
C18 C32 C34 C36 C52 C71: library part CAE430-540_10UF_16V_20%, "Polarised capacitor"
C73 C75: library part CC0805_22UF_16V_10%_X5R, "Non-polarised capacitor"
FTG17: library part FIDUCIAL_TARGET_C100-200, "Fiducial Target"
FTG18 FTG20: library part FIDUCIAL_TARGET_S100-200, "Fiducial Target"
FTG19: library part FIDUCIAL_TARGET_S200-400, "Fiducial Target"
IC8 IC29: "25 Ohms Octal Bus Transceiver With 3-State Outputs"
IC9 IC21: "4-Channel Half-Duplex M-LVDS Line Transceiver"
IC10 IC11 IC22 IC28: "Low Power Five-Channel Digital Isolator"
IC12 IC31: "1 W Watt, 10.8-13.2VDCVin, 5 V@0.2 A"
IC13: "Remote 8-bit I/O Expander For I2C Bus"
IC30: "4.75-28VDC to 1-6VDC, 500mA Step-Down Converter With Sleep Mode"
IC32: "1.7V-5.5V, 2K I2C Serial EEPROM With EUI-48 Node Identity"
J35 J36 J38 J39: library part BOMAR_364A2595, "Dual Right Angle 50 Ohm BNC Jack, White Valox Case"
J37: library part 3M_N2530-6002RB, "Connector 30 Male"
L1: library part IND_10UH_10%_MURATA-PS_8400, "Inductor With Core"
LD5 LD6: library part LED_MENTOR_1801.8233, "2x LED  Botom Green, Top Red"
R134 R135 R153 R154: library part R0603_220R_1%_0.1W_100PPM, "Resistor - 1%"
R136 R137 R140 R143 R146 R149 R150 R152 R155 R156 R159 R162 R165 R169 R171 R172: library part R0402_10K_1%_0.0625W_100PPM, "Resistor - 1%"
R138 R141 R144 R147 R151 R157 R160 R163 R166 R170: library part R0402_100R_1%_0.1W_100PPM, "Resistor - 1%"
R139 R142 R145 R148 R158 R161 R164 R168: library part R1210_49R9_1%_0.5W_100PPM_VISHAY_CRCW, "Resistor - 1%"
R167: library part R0603_270K_1%_0.1W_100PPM, "Resistor - 1%"
R173: library part R0603_82K_1%_0.1W_100PPM, "Resistor - 1%"
SW3 SW8: library part SW_OMRON_A6S-4102-H, "4 Ways SPST DIP Switch"
SW9: library part SW_OMRON_A6S-2102-H, "2 Ways SPST DIP Switch"
T26 T27 T28 T29: "N-CHANNEL MOSFET WITH DIODE"

## Free pads (board coordinates)
  round 236.22 hole 125.98: 0(2299.21,299.21) 1(2299.21,3645.67) 2(1118.11,3645.67) 3(1118.11,299.21)
  round 50 hole 110: 1(140,3717) 2(140,217)

## Via types
v1: diameter 19.68, hole 7.87, TopLayer to BottomLayer, tented both sides, 340 vias
v2: diameter 23.62, hole 11.81, TopLayer to BottomLayer, tented both sides, 15 vias

## Nets (pads, with @x,y where several pads share a name; then routed paths per layer and width w, separated by ;. In a path a pad name is that pad's centre, name@x,y a point inside that pad or via, vN(x,y) a via of type N, cw(c..) or ccw(c..) an arc to the next point about the centre after c; other vN are vias at no path point)
DIR1_RD: IC28.6
DIR2_RD: IC11.6
DIR_CTRL1: IC13.4 IC13.5 IC13.6 IC13.7 IC21.1 IC21.5 IC21.8 IC21.12 IC21.19 IC21.21 IC21.40 IC21.42 R134.2 R137.1 SW9.1 T26.1 | length 4593.5
  TopLayer w5: R134.2@705.5,3716 811,3716 895,3800 1755,3800 1797,3758 1797,3495.97 1808.97,3484 1808.97,3372.03 1835,3346 1922,3346 1936,3332 IC13.4@2025.93,3332 2083,3332 2100,3315 2100,3283 ; IC21.8@1714.17,2805.47 1745.47,2805.47 1746,2806 ; IC21.5@1714.17,2864.53 1744.47,2864.53 1746,2863 ; v1(1736,3157) 1736,3136 1678,3078 1678,3044 1690,3032 1690,2951 1695,2946 1711.44,2946 IC21.1@1714.17,2943.27 1716.44,2941 1749,2941 ; v1(1844,3195) 1934,3195 1947,3182 IC13.7@2025.93,3182 2087,3182 2100,3195 2100,3231 ; SW9.1@1859,2120.8 SW9.1@1853,2120.8 1816.8,2120.8 1758.5,2062.5 1743,2062.5 1738.5,2067 1579,2067 1563,2083 1563,2142 1575,2154 1575,2561 1608,2594 1626,2594 1693,2661 1693,2714 1705.73,2726.73 IC21.12@1714.17,2726.73 1738.73,2726.73 1746,2734 ; IC21.19@1859.84,2699.17 1859.84,2732.16 1858,2734 ; IC21.42@1859.84,2970.83 1859.84,2948.84 ; IC21.40@1897,2968.61 IC21.40@1899.21,2970.83 1899.21,2943.21 1897,2941 1867.69,2941 1859.84,2948.84 ; IC21.21@1899.21,2699.17 1899.21,2724.79 1890,2734 1858,2734 ; IC13.6@2025.93,3232 2099,3232 2100,3231 ; IC13.5@2025.93,3282 2099,3282 2100,3283 ; 1746,2734 1858,2734 ; 1746,2734 1746,2806 ; 1746,2806 1746,2863 ; 1746,2863 1746,2938 1749,2941 ; 1749,2941 1852,2941 1859.84,2948.84 ; 2100,3231 2100,3283
  BottomLayer w5: v1(1736,3157) 1774,3195 v1(1844,3195)
DIR_CTRL2: IC9.1 IC9.5 IC9.8 IC9.12 IC9.19 IC9.21 IC9.40 IC9.42 IC13.9 IC13.10 IC13.11 IC13.12 R153.2 R156.1 SW9.2 T28.1 | length 6304.2
  TopLayer w5: v1(318,204) 318,254 R153.2@319,255 ; IC9.8@1586.17,995.47 1616.53,995.47 1617,995 ; IC9.5@1586.17,1054.53 1615.47,1054.53 1617,1053 ; IC9.19@1731.84,889.17 1731.84,921.84 1732,922 ; IC9.42@1731.84,1160.83 1731.84,1129.84 1730,1128 ; T28.1@1736.6,353.72 1736.6,305.1 1724.5,293 1700,293 1652,245 v1(1571,245) 1516,245 1483,278 1483,722 1570,809 1570,910 1576.73,916.73 IC9.12@1586.17,916.73 1610.73,916.73 1622,928 ; IC9.21@1771.21,889.17 1771.21,914.79 1764,922 1732,922 ; IC9.40@1771.21,1160.83 1771.21,1133.21 1766,1128 1730,1128 ; SW9.2@1953,2120.8 SW9.2@1959,2120.8 ; v1(2205,3052) 2204.34,3051.34 2204.34,2865.82 2200,2861.47 2200,2751 2054,2605 2054,2167 2007.8,2120.8 SW9.2@1959,2120.8 ; IC13.9@2392.07,3132 2329,3132 2327,3134 ; IC13.10@2392.07,3182 2328,3182 2327,3183 ; IC13.11@2392.07,3232 2330,3232 2327,3229 ; IC13.12@2392.07,3282 2343,3282 2327,3266 2327,3229 ; v1(2393,3043) 2327,3109 2327,3134 ; 1617,995 1617,933 1622,928 ; 1617,995 1617,1053 ; 1617,1053 1617,1119 ; 1617,1119 1626,1128 1730,1128 ; 1617,1119 1602.73,1133.27 IC9.1@1586.17,1133.27 1586.17,1174.83 1470,1291 1470,1720.36 1666.64,1917 1891,1917 1959,1985 SW9.2@1959,2120.8 ; 1622,928 1628,922 1732,922 ; 2327,3134 2327,3183 ; 2327,3183 2327,3229
  BottomLayer w5: v1(318,204) 408,204 455,157 1483,157 v1(1571,245) ; v1(2205,3052) 2384,3052 v1(2393,3043)
GND: C14.1 C15.1 C16.1 C17.1 C18.2 C19.1 C20.1 C21.1 C22.1 C23.1 C24.1 C33.1 C34.2 C35.1 C36.2 C37.1 C38.1 C53.1 C54.1 C55.1 C56.1 C69.1 C70.1 C71.2 C72.1 C73.1 C74.1 C75.1 IC9.6 IC9.7 IC9.18 IC9.23 IC9.27 IC9.31 IC9.34 IC9.38 IC9.43 IC9.49 IC10.9 IC11.8 IC12.2 IC13.1 IC13.8 IC21.6 IC21.7 IC21.18 IC21.23 IC21.27 IC21.31 IC21.34 IC21.38 IC21.43 IC21.49 IC22.9 IC28.8 IC30.1 IC30.6 IC30.11 IC31.2 IC32.2 J37.1 J37.4 J37.7 J37.10 J37.13 J37.16 J37.19 J37.22 J37.25 R138.2 R152.2 R157.2 R171.2 R173.1 SW9.3 SW9.4 T26.2 T28.2 | length 3345.3
  TopLayer w10: v1(478,245) 490.57,232.43 C75.1@490.57,193 ; v1(502,256) C74.1@530.28,256 ; IC30.1@536.63,309.66 536.63,343.63 IC30.11@538,345 ; IC30.6@615.37,392.34 615.37,357.63 IC30.11@617,356 ; C21.1@668,548.72 668,582 v1(669,583) ; v1(677,434) C73.1@729.57,434 ; v1(677.43,461.57) C73.1@730,461.57 ; R173.1@682.5,255 v1(718,255) ; v1(1499.28,848.28) C69.1@1499.28,878 ; C70.1@1501.28,1169 v1(1501.28,1201.28) ; 1547.16,1015.16 IC9.7@1586.17,1015.16 ; 1550,1025 1559.84,1034.84 IC9.6@1586.17,1034.84 ; IC10.9@1560.3,294 1633.72,294 C22.1@1639,299.28 1640.72,301 v1(1675,301) ; v1(1596,2978) C14.1@1624.28,2978 ; v1(1625.28,2658.72) C15.1@1625.28,2691 ; v1@1636.72,1630.72 v1(1639,1633) ; IC22.9@1643.3,2202 1709.72,2202 C16.1@1716,2208.28 v1(1749.72,2208.28) ; IC28.8@1655.3,3480 1731.72,3480 C53.1@1736,3475.72 v1(1769.72,3475.72) ; C72.1@1686,1262.72 v1(1714.28,1262.72) ; v1(1689.28,2113.72) T26.2@1689.28,2139.4 ; IC9.18@1712.16,889.17 1712.16,862.84 1729.72,845.28 C24.1@1729.72,829 v1(1729.72,797.28) ; IC9.43@1712.16,1160.83 1712.16,1184.16 1743,1215 v1(1743,1231) ; IC21.7@1714.17,2825.16 1680.84,2825.16 1672,2834 1682.84,2844.84 IC21.6@1714.17,2844.84 ; IC9.49@1722,1025 IC9.49@1731.84,1034.84 ; R157.2@1788,797 1812,797 v1(1825,810) 1824.16,810.84 1824.16,848.84 1810.58,862.42 IC9.23@1810.58,889.17 ; R171.2@1788,1261.5 v1(1788,1293) ; IC9.38@1810.58,1160.83 1810.58,1113.58 IC9.49@1731.84,1034.84 ; v1(1811.4,303.6) T28.2@1811.4,353.72 ; C55.1@1822,3071.72 v1(1822,3099) ; v1(1830,1300) 1830,1265.72 C20.1@1836,1259.72 ; IC21.18@1840.16,2699.17 1840.16,2670.84 1860.72,2650.28 C54.1@1860.72,2632 1853,2624.28 v1(1853,2596) ; IC21.43@1840.16,2970.83 v1(1840.16,3005.16) ; C33.1@1843.28,3509 1843.28,3598.28 IC31.2@1846,3601 ; SW9.4@1853,2471.2 SW9.3@1953,2471.2 ; IC9.27@1857.83,956.1 v1(1899.9,956.1) ; IC9.31@1857.83,1034.84 IC9.49@1731.84,1034.84 ; IC9.34@1857.83,1093.9 v1(1895.1,1093.9) ; R138.2@1878,3070.5 v1(1878,3095) ; v1(1933,2571) 1933,2590.5 R152.2@1920,2603.5 1947.5,2603.5 1953,2609 1953,2654 1938.58,2668.42 IC21.23@1938.58,2699.17 1938.58,2746.42 IC21.49@1850,2835 v1(1852,2837) IC21.49@1859.84,2844.84 ; v1(1938,3010) 1938,2971.41 IC21.38@1938.58,2970.83 1938.58,2931.77 1942.68,2927.68 IC21.49@1859.84,2844.84 ; C23.1@1946.72,1017 v1(1946.72,1052.28) ; SW9.3@1967,2491 1980,2504 v1(1980,2527) ; IC21.27@1985.83,2766.1 v1(2020.1,2766.1) ; IC21.31@1985.83,2844.84 IC21.49@1859.84,2844.84 ; IC21.34@1985.83,2903.9 v1(2017.9,2903.9) ; IC13.8@2025.93,3132 v1(2081,3132) ; IC13.1@2025.93,3482 v1(2086,3482) ; C19.1@2056.72,2990 2056.72,2960.28 v1(2057,2960) ; C56.1@2085.72,2828 2085.72,2830.72 2100,2845 v1(2100,2850) ; v1(2156,2982) C38.1@2156,3020.28 ; v1(2176,2460) IC32.2@2212.82,2460 ; v1(2371,2353) C37.1@2371,2389.82
  other v1: 2006,304 2028,304 2051,304 904,315 944,315 452,330 474,330 497,330 944,337 904,338 2006,344 2029,344 2051,344 452,350 475,350 497,350 904,360 944,360 452,370 475,370 497,370 949,407 989,407 989,429 949,430 949,452 989,452 1668,776 1579,778 1489,921 1785,964 1722.44,964.57 1664,969 1490,1016 1663.39,1023.62 1722.44,1023.62 1781.5,1023.62 1537,1025 1661,1089 1782,1090 1722.44,1092.52 1483,1130 1670,1300 1644,1679 1711,1948 1733,1948 1756,1948 1711,1988 1734,1988 1756,1988 1796,2590 1709,2623 1603,2735 1918,2766 1786,2772 1850.39,2775.59 1566,2778 1791.34,2834.65 1909.45,2834.65 1850.39,2893.7 1784,2901 1920,2904 1626,2935 1706,3065 1790,3104 1776,3273 1798,3273 1821,3273 1776,3313 1799,3313 1821,3313 536,3503 848,3602 1282,3727 500,3764
  other v2: 1683.07,196.85 1988.19,196.85 1879.92,501.97 1663.39,511.81 1998.03,551.18 1958.66,698.82 1486.22,777.56 1968.5,807.09 2066.93,1309.06 1958.66,1427.17 1801.18,1525.59 1594.49,1535.43 2076.77,1545.28 1545.28,1751.97 1879.92,1791.34
GND_ISO1: C48.1 C49.1 C50.1 C51.1 C52.2 IC22.8 IC28.9 IC29.2 IC29.5 IC29.8 IC29.11 IC31.4 J35.1 J35.3 J36.1 J36.3 R140.1 R143.1 R146.1 R149.1 SW8.1 SW8.2 SW8.3 SW8.4 T27.2 | length 851.1
  TopLayer w10: v1(789,2881) R143.1@818.5,2881 ; v1(789.5,2931) R146.1@818.99,2931 ; v1(816.5,2598.5) R140.1@816.5,2629 ; v1(875,3101.5) R149.1@875,3135 ; v1(899,2680) 900,2681 IC29.11@959.93,2681 ; v1(901,2982) 902,2981 IC29.5@959.93,2981 ; v1(903,2832) 904,2831 IC29.8@959.93,2831 ; v1(904,3131) IC29.2@959.93,3131 ; v1(1076,2298) 1077,2297 SW8.2@1128.2,2297 ; v1(1076,2396) 1077,2397 SW8.3@1128.2,2397 ; v1(1079,2196) 1080,2197 SW8.1@1128.2,2197 ; v1(1081,2498) 1082,2497 SW8.4@1128.2,2497 ; v1(1328,2214) 1368.28,2214 C48.1@1370,2212.28 1380.28,2202 IC22.8@1430.7,2202 ; v1(1329.28,3474.72) C51.1@1366,3474.72 1371.28,3480 IC28.9@1442.7,3480 ; v1(1441.72,2998.28) C49.1@1441.72,3031 ; v1(1458.72,2745.28) C50.1@1458.72,2781
  other v1: 767.72,3297.24 807.09,3297.24 846.46,3297.24 767.72,3326.77 807.09,3326.77 846.46,3326.77 767.72,3366.14 807.09,3366.14 846.46,3366.14
GND_ISO2: C28.1 C29.1 C30.1 C31.1 C32.2 IC8.2 IC8.5 IC8.8 IC8.11 IC10.8 IC11.9 IC12.4 J38.1 J38.3 J39.1 J39.3 R159.1 R162.1 R165.1 R169.1 SW3.1 SW3.2 SW3.3 SW3.4 T29.2 | length 884.9
  TopLayer w20: v1(729,1158) R169.1@759.5,1158 ; v1(731,1001) R165.1@763.5,1001 ; v1(735,901) R162.1@763.5,901 ; v1(764.28,817.28) 764.28,846 ; v1(766.5,715.5) R159.1@766.5,746 ; IC8.11@881.93,695 v1(945,695) ; IC8.8@881.93,845 v1(941,845) ; IC8.5@881.93,995 v1(943,995) ; IC8.2@881.93,1145 v1(940,1145) ; v1(1093,1341) SW3.1@1148.2,1341 ; v1(1097,1644) 1100,1641 SW3.4@1148.2,1641 ; v1(1099,1443) 1101,1441 SW3.2@1148.2,1441 ; v1(1100,1541) SW3.3@1148.2,1541 ; v1(1210,1646) IC11.9@1319.7,1646 ; v1(1219,543) 1219.6,542.4 T29.2@1259.28,542.4 ; C28.1@1308,303.28 C28.1@1308,294 ; v1(1310,264) 1308,266 C28.1@1308,294 ; v1(1337,987) C30.1@1337,1011.28 ; IC10.8@1347.7,294 C28.1@1308,294 ; v1(1377.72,762.28) C29.1@1377.72,795
  other v1: 643.46,1830.28 682.83,1830.28 722.2,1830.28 643.46,1859.8 682.83,1859.8 722.2,1859.8 643.46,1899.17 682.83,1899.17 722.2,1899.17
I2C_SCL: IC13.14 IC32.1 J37.27 | length 2958
  TopLayer w5: J37.27@2194,750 2243,799 2334,799 2378,843 2378,2307 2265,2420 2265,2479 2246.6,2497.4 IC32.1@2212.82,2497.4 2212.82,2582.82 2309,2679 2309,3357 2334,3382 IC13.14@2392.07,3382
I2C_SDA: IC13.15 IC32.3 J37.26 | length 2863.2
  TopLayer w5: J37.26@2294,850 2346,902 2346,2320 2243.4,2422.6 IC32.3@2212.82,2422.6 2164.4,2422.6 2149,2438 2149,2496 2185,2532 2185,2591 2289,2695 2289,3382 2339,3432 IC13.15@2392.07,3432
IO1: IC29.10 IC29.12 J35.4 R139.2 R140.2 | length 1166.1
  TopLayer w10: J35.4@463.09,2370.32 512.42,2321 626,2321 703,2398 703,2601 802.5,2700.5 853.5,2700.5 ; IC29.12@932.93,2629 R140.2@853.5,2629 853.5,2700.5 ; IC29.10@959.93,2731 884,2731 853.5,2700.5
  BottomLayer w10: v1(626,2316) 652.94,2289.06 R139.2@652.94,2118
IO2: IC29.7 IC29.9 J36.4 R142.2 R143.2 | length 1376.4
  TopLayer w10: J36.4@463.09,3078.98 463.09,2994.91 534,2924 678,2924 v1(706,2896) ; R143.2@855.5,2881 v1(882,2881) v1@886,2881 ; IC29.7@929.93,2881 v1@886,2881 ; v1(977,2400) 977,2532 1045,2600 1045,2761 1025,2781 IC29.9@959.93,2781 896,2781 883.16,2793.84 883.16,2878.16 v1@886,2881
  BottomLayer w10: v1(706,2896) 710.84,2900.84 862.16,2900.84 v1(882,2881) ; R142.2@975.06,2306 975.06,2398.06 v1(977,2400)
IO3: IC29.4 IC29.6 J35.2 R145.2 R146.2 | length 1215.3
  TopLayer w10: J35.2@563.09,2370.32 640,2447.23 640,2800 731,2891 731,2920 804,2993 856,2993 ; IC29.6@934.43,2931 R146.2@856,2931 856,2993 ; IC29.6@959.93,2931 1060,2931 v1(1076,2915) ; IC29.4@959.93,3031 894,3031 856,2993
  BottomLayer w10: v1(1076,2915) 1081,2910 R145.2@1081,2859.06
IO4: IC29.1 IC29.3 J36.2 R148.2 R149.2 | length 744.7
  TopLayer w10: J36.2@563.09,3078.98 831.98,3078.98 845,3092 ; IC29.1@959.93,3181 883.99,3181 R149.2@875,3172.01 845.5,3172.01 845,3171.5 845,3092 ; v1(1021,3082) 1020,3081 IC29.3@959.93,3081 856,3081 845,3092
  BottomLayer w10: v1(1021,3082) 1026.06,3087.06 R148.2@1097,3087.06
IO5: IC8.10 IC8.12 J38.4 R158.2 R159.2 | length 907.3
  TopLayer w10: J38.4@463.09,953 514.09,902 624,902 738,788 762.26,788 803.5,746.76 R159.2@803.5,746 ; IC8.10@877.93,746 R159.2@803.5,746 ; IC8.12@881.93,645 816,645 803.5,657.5 R159.2@803.5,746 ; IC8.10@881.93,745 994,745 v1(1044,795)
  BottomLayer w10: R158.2@1043,845.94 1044,844.94 v1(1044,795)
IO6: IC8.7 IC8.9 J39.4 R161.2 R162.2 | length 1354
  TopLayer w10: J39.4@463.09,1661.66 463.09,1327.91 734,1057 v1(756,1057) ; R162.2@800.5,901 IC8.7@880.93,901 ; IC8.9@881.93,795 937,795 961,819 961,873 939,895 IC8.7@881.93,895
  BottomLayer w10: R161.2@344,1662.06 462.7,1662.06 J39.4@463.09,1661.66 ; v1(756,1057) 829,984 v1(829,903)
IO7: IC8.4 IC8.6 J38.2 R164.2 R165.2 | length 637.3
  TopLayer w10: J38.2@563.09,953 809,953 ; IC8.6@881.93,945 817,945 809,953 ; v1(947,1048) 944,1045 IC8.4@881.93,1045 812,1045 800.5,1033.5 R165.2@800.5,1001 800.5,961.5 809,953
  BottomLayer w10: v1(947,1048) 1020.06,1048 R164.2@1024,1051.94
IO8: IC8.1 IC8.3 J39.2 R168.2 R169.2 | length 1037.8
  TopLayer w10: J39.2@563.09,1661.66 646.34,1661.66 750,1558 750,1205.26 796.5,1158.76 R169.2@796.5,1158 ; IC8.3@881.93,1095 822,1095 796.5,1120.5 R169.2@796.5,1158 ; IC8.1@881.93,1195 833.5,1195 R169.2@796.5,1158
  BottomLayer w10: J39.2@563.09,1661.66 564.43,1663 675.94,1663 R168.2@704.94,1692
LVDS1_N: IC21.48 J37.3 R141.2 | length 1491.7
  TopLayer w10: v1(1739.16,3078) 1744,3073.16 1744,3039.5 R141.2@1732.5,3028 1744.07,3016.42 1744.07,2995.89 1741.73,2993.54 IC21.48@1741.73,2970.83
  BottomLayer w10: v1(1739.16,3078) 1741,3078 1744,3075 1744,3020.72 1811.91,2952.81 1904.98,2952.81 1949.89,2907.89 1949.89,2760.11 2119,2591 2119,2114.4 2152.51,2080.89 2152.51,2032.81 2194,1991.32 J37.3@2194,1950
LVDS1_P: IC21.47 J37.2 R141.1 | length 1478.4
  TopLayer w10: IC21.47@1761.42,2970.83 1761.42,2993.54 1759.07,2995.89 1759.07,3017.57 R141.1@1769.5,3028 1759,3038.5 1759,3073.16 v1(1763.84,3078)
  BottomLayer w10: v1(1763.84,3078) 1762,3078 1759,3075 1759,3026.94 1818.13,2967.81 1911.19,2967.81 1964.89,2914.11 1964.89,2766.32 2134,2597.21 2134,2120.61 2163.11,2091.5 2211.19,2091.5 2252.69,2050 J37.2@2294,2050
LVDS2_N: IC21.4 J37.6 R144.2 | length 1650
  TopLayer w10: v1(1605,2880.16) 1605,2885 1646.5,2885 R144.2@1658,2873.5 1663,2878.5 1663,2878.56 1671,2886.56 1689.11,2886.56 1691.46,2884.21 IC21.4@1714.17,2884.21
  BottomLayer w10: v1(1605,2880.16) 1605.92,2881.08 1603.13,2881.08 1599.21,2885 1581,2885 1577,2881 1577,2852.21 1581.21,2848 1667,2848 1802,2713 1888.21,2713 2067,2534.21 2067,1971 2147,1891 2176.32,1891 2176.81,1891.5 2252.51,1891.5 J37.6@2294,1850
LVDS2_P: IC21.3 J37.5 R144.1 | length 1589.7
  TopLayer w10: v1(1605,2904.84) 1605,2902.06 1607.06,2900 1647.5,2900 R144.1@1658,2910.5 1666.95,2901.56 1689.11,2901.56 1691.46,2903.9 IC21.3@1714.17,2903.9
  BottomLayer w10: v1(1605,2904.84) 1605.92,2903.92 1602,2900 1574.79,2900 1562,2887.21 1562,2846 1575,2833 1660.79,2833 1795.79,2698 1882,2698 2052,2528 2052,1964.79 2140.79,1876 2168,1876 J37.5@2194,1850
LVDS3_N: IC21.10 J37.9 R147.2 | length 1571.4
  TopLayer w10: v1(1603,2765.16) 1607.84,2770 1648.5,2770 R147.2@1661,2757.5 1671.95,2768.44 1689.11,2768.44 1691.46,2766.1 IC21.10@1714.17,2766.1
  BottomLayer w10: v1(1603,2765.16) 1603,2768 1605,2770 1626,2770 1755.5,2640.5 1867.5,2640.5 1885,2623 1885,2523.79 1973,2435.79 1973,1960.4 2152.51,1780.89 2152.51,1732.81 2194,1691.32 J37.9@2194,1650
LVDS3_P: IC21.9 J37.8 R147.1 | length 1582.6
  TopLayer w10: v1(1603,2789.84) 1607.84,2785 1651.5,2785 R147.1@1661,2794.5 1672.06,2783.44 1689.11,2783.44 1691.46,2785.79 IC21.9@1714.17,2785.79
  BottomLayer w10: v1(1603,2789.84) 1603,2787 1605,2785 1632.21,2785 1761.71,2655.5 1873.71,2655.5 1900,2629.21 1900,2530 1988,2442 1988,1966.61 2163.11,1791.5 2211.19,1791.5 2252.69,1750 J37.8@2294,1750
LVDS4_N: IC21.14 J37.12 R151.2 | length 1434.9
  TopLayer w10: IC21.14@1761.42,2699.17 1761.42,2676.46 1759.07,2674.11 1759.07,2654.43 R151.2@1770.5,2643 1759,2631.5 1759,2608.84 v1(1763.84,2604)
  BottomLayer w10: v1(1763.84,2604) 1759,2599.16 1759,2539 1901,2397 1901,1858.21 2167.72,1591.5 2211.19,1591.5 2252.69,1550 J37.12@2294,1550
LVDS4_P: IC21.13 J37.11 R151.1 | length 1352.8
  TopLayer w10: v1(1739.16,2604) 1744,2608.84 1744,2632.5 R151.1@1733.5,2643 1744.07,2653.58 1744.07,2674.11 1741.73,2676.46 IC21.13@1741.73,2699.17
  BottomLayer w10: v1(1739.16,2604) 1744,2599.16 1744,2532.79 1886,2390.79 1886,1852 2188,1550 J37.11@2194,1550